# Altium PCB PCB1.PcbDoc
Units mm, origin at the board's own origin, x right, y up, seen from the top; angles counter-clockwise.
Board outline 91.81 x 66.02 mm, 2 copper layers (Top Layer, Bottom Layer), stack 0.325 mm thick; 31 components, 23 nets, 124 pads, 2 vias.
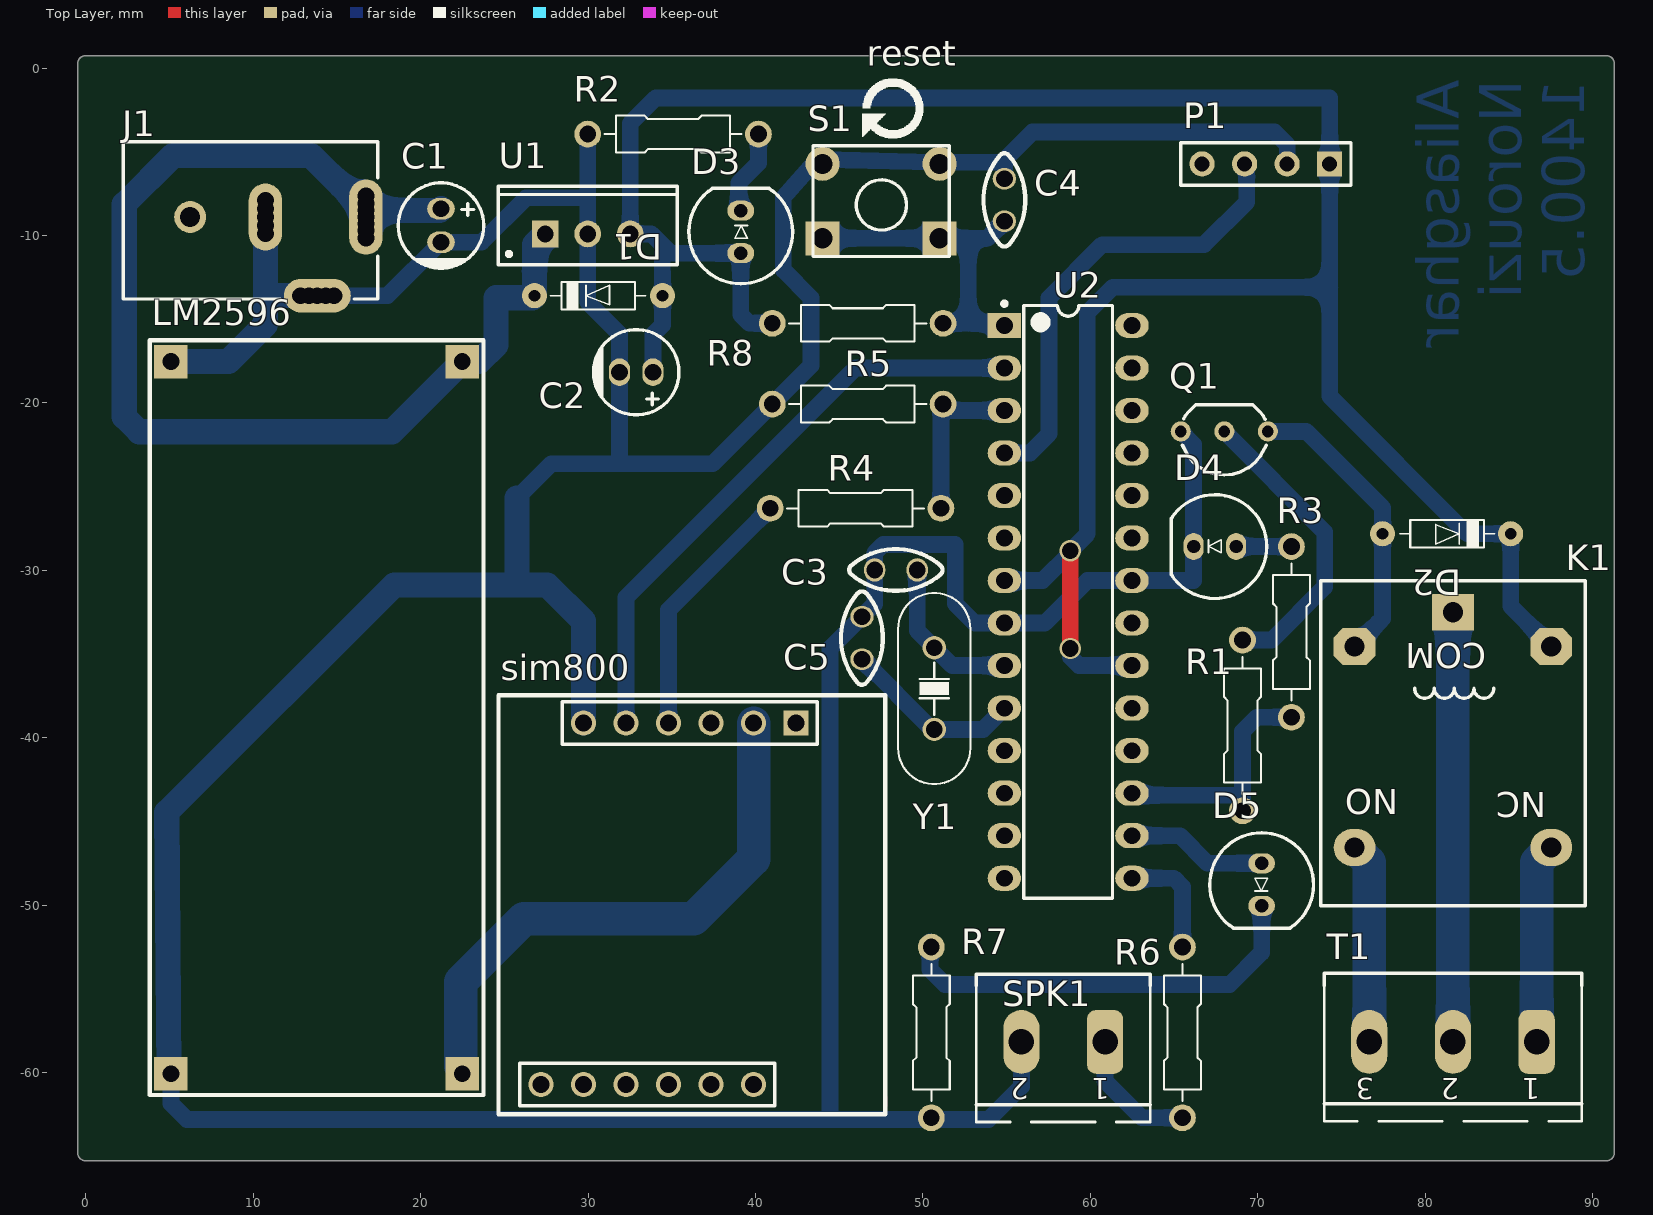
[diagram p0: Top Layer view]
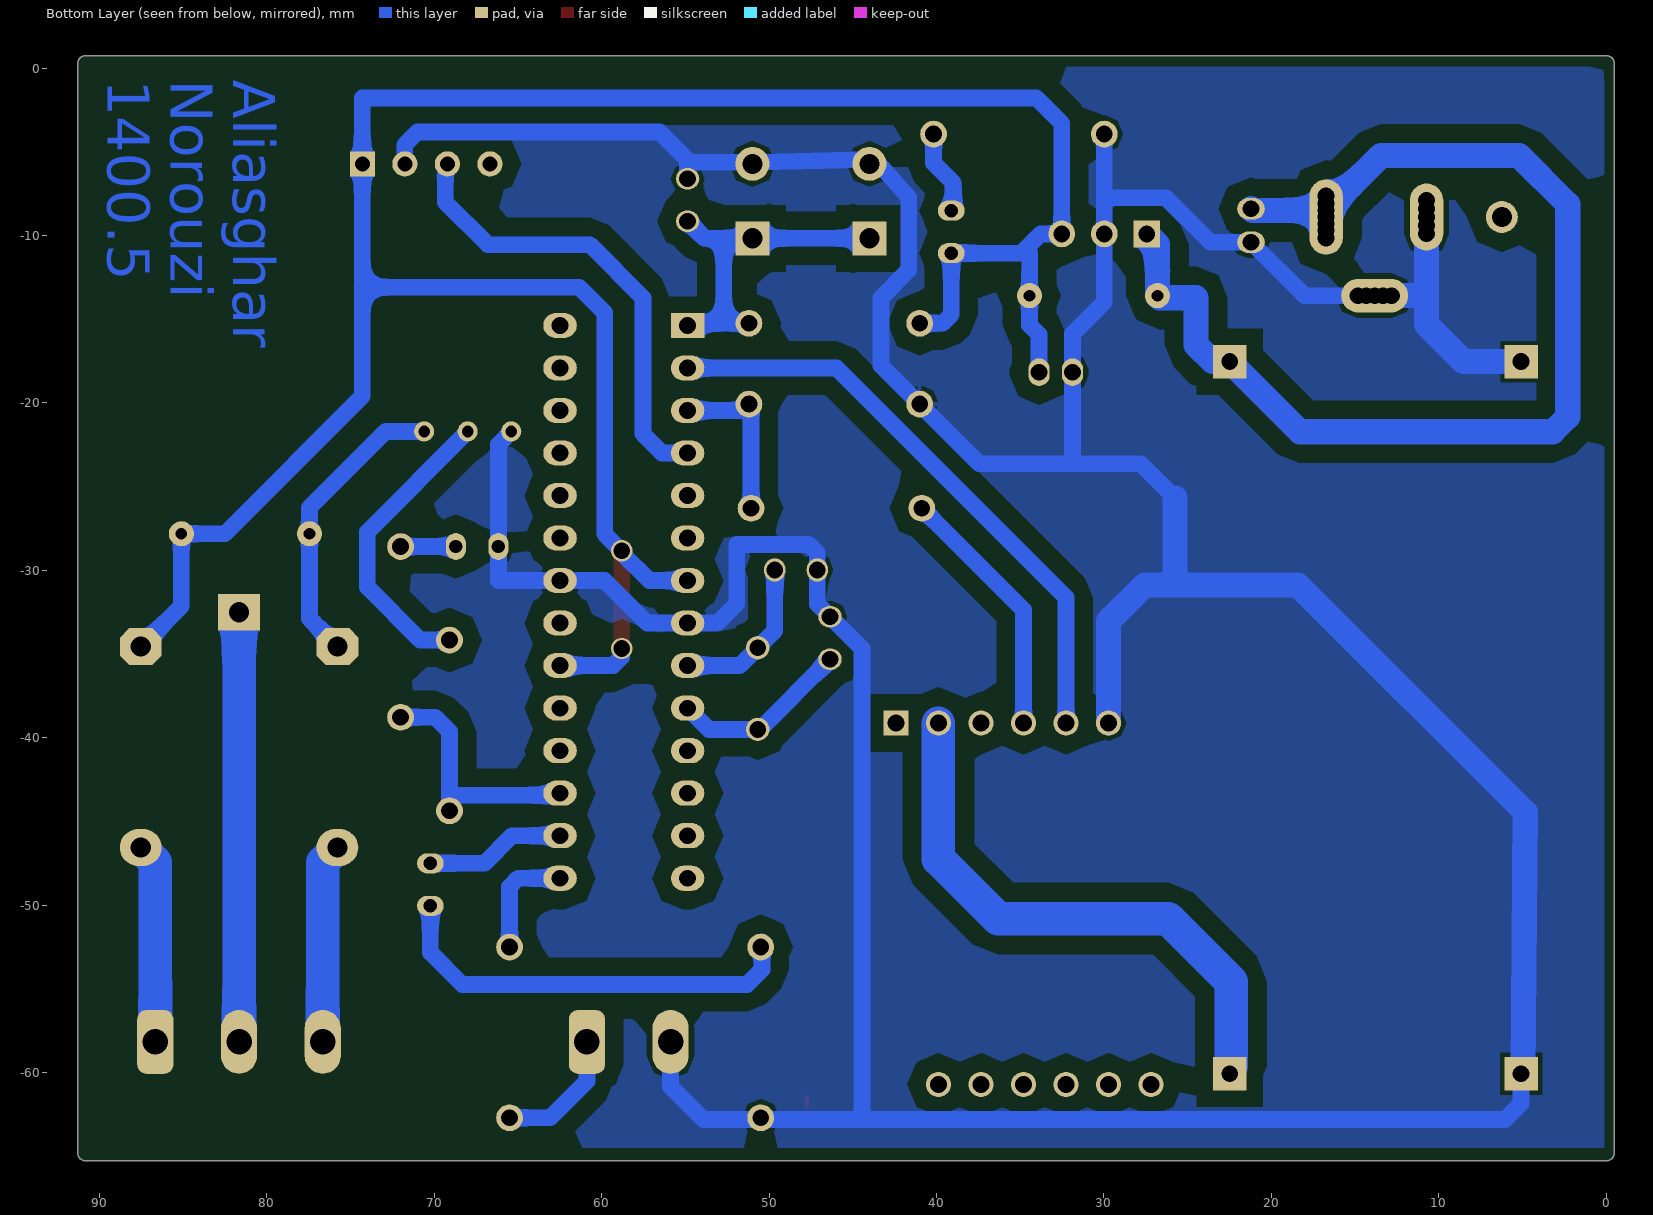
[diagram p1: Bottom Layer view, seen from below]
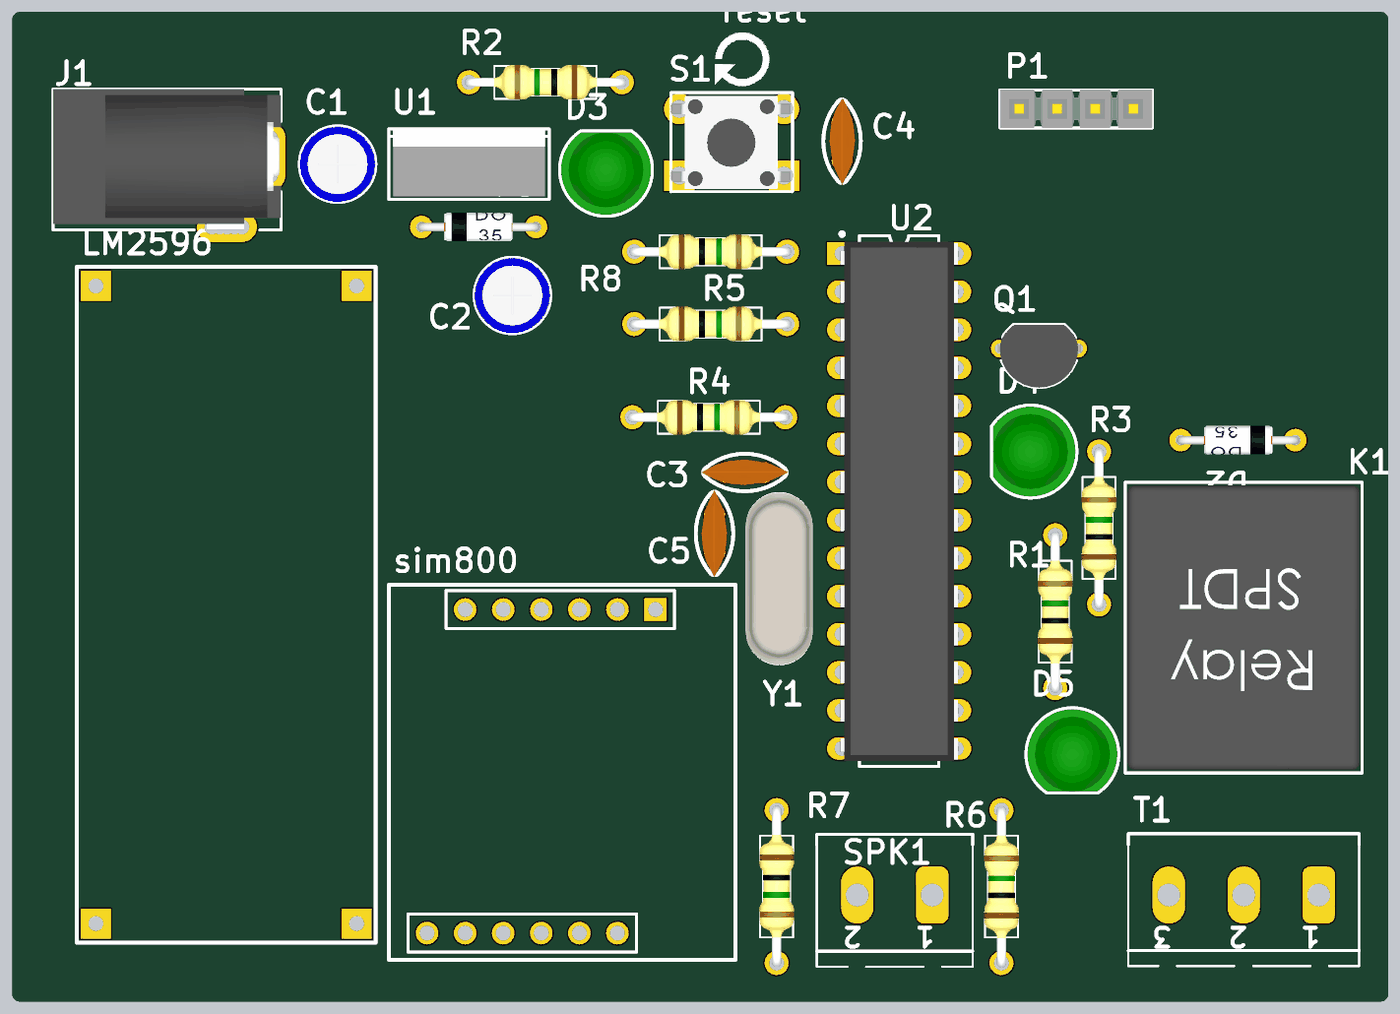
[diagram p2: 3D render of the assembled board from above, using the file's embedded part models]

## Layer stack, top to bottom
Top Solder: solder mask 0.0102, Solder Resist, Dk 3.5
Top Layer: signal copper 0.0356
Dielectric 1: dielectric 0.254, FR-4, Dk 4.2
Bottom Layer: signal copper 0.0356
Bottom Solder: solder mask 0.0102, Solder Resist, Dk 3.5

## Board outline
0,-65.27 cw(c0,-64.77) -0.5,-64.77 -0.5,0.254 cw(c0,0.254) 0,0.754 90.805,0.754 cw(c90.805,0.254) 91.305,0.254 91.305,-64.77 cw(c90.805,-64.77) 90.805,-65.27

## Design rules (kind name [scope] priority, off if disabled: settings)
Clearance [All] p1: gap=1 ignorepadtopadclearanceinfootprint=FALSE
Clearance "Poly Cls" [InPolygon] p2: gap=1.2 ignorepadtopadclearanceinfootprint=FALSE
PolygonConnect PolygonConnect_1 [InPolygon vs IsNamedPolygon('GND_L02_P006')] p1: connectstyle=Relief reliefconductorwidth=0.254 reliefentries=4 polygonreliefangle="90 Angle" airgapwidth=0.254
PolygonConnect [All] p2: connectstyle=Relief reliefconductorwidth=0.254 reliefentries=4 polygonreliefangle="90 Angle" airgapwidth=0.254
RoomDefinition Sheet1 [InComponentClass('Sheet1')] p1: confinementstyle=ConfineIn formatcopy=TRUE lockcomponents=FALSE outline -0.5,-65.3 91.3,-65.3 91.3,0.8 -0.5,0.8
RoutingVias [All] p1: holewidth=1 width=1.27 viastyle="Through Hole" minholewidth=1 minwidth=1.27 maxholewidth=1 maxwidth=1.27
SolderMaskExpansion [All] p1: expansion=0.102
Width [All] p1: maxlimit=2 minlimit=1 preferedwidth=1.5
30 further rules are at their usual default settings.

## Components (designator, comment, footprint, x,y, rotation, side; value= is the part's Value field where it differs from the comment)
C1 "20uF" "cap 01" 21.209,-9.398 r90 top
C2 "100uF" "cap 01" 32.872,-18.161 r0 top
C3 "22pF" "Cap - 100nF" 48.387,-29.972 r180 top
C4 "100n" "Cap - 100nF" 54.864,-7.874 r90 top
C5 "22pF" "Cap - 100nF" 46.355,-34.036 r270 top
D1 "1N4007" "DO 35" 30.622,-13.589 r0 top
D2 "1N4007" "DO 35" 81.28,-27.813 r180 top
D3 "LED5MM" LED5MM_YELLOW 39.116,-9.779 r90 top
D4 "LED5MM" LED5MM_YELLOW 67.437,-28.575 r180 top
D5 "LED5MM" LED5MM_BLUE 70.231,-48.768 r270 top
J1 "Power Jack" "Power Jack" 2.223,-8.89 r0 top
K1 "" "Relay 18.85x15.35x15.70" 81.657,-39.527 r180 top
LM2596 "LM2596" LM2696 23.749,-16.256 r270 top
P1 "Header 4" HDR1X4 74.295,-5.715 r180 top
Q1 "BC547" "TO-92 BENT" 68,-21.7 r180 top
R1 "1K" "Axial 0_25 W, 0_4 IN LEAD PITCH" 69.088,-39.263 r90 top
R2 "1K" "Axial 0_25 W, 0_4 IN LEAD PITCH" 35.072,-3.937 r180 top
R3 "1K" "Axial 0_25 W, 0_4 IN LEAD PITCH" 72.009,-33.675 r90 top
R4 "120" "Axial 0_25 W, 0_4 IN LEAD PITCH" 45.974,-26.289 r0 top
R5 "220" "Axial 0_25 W, 0_4 IN LEAD PITCH" 46.101,-20.066 r0 top
R6 "100" "Axial 0_25 W, 0_4 IN LEAD PITCH" 65.5,-57.6 r90 top
R7 "1K" "Axial 0_25 W, 0_4 IN LEAD PITCH" 50.5,-57.6 r270 top
R8 "10k" "Axial 0_25 W, 0_4 IN LEAD PITCH" 46.101,-15.24 r0 top
reset "Comment" "LOGO RESET" 48.3,-2.4 r0 top
S1 "Switch PB" "Switch - Push to On" 47.498,-7.937 r180 top
sim800 "sim800l" PCBComponent_1 24.384,-37.465 r270 top
SPK1 "1753437" "MSTBV 2,5/2-G-5" 58.38,-58.166 r180 top
T1 "1753453" "MSTBV 2,5/3-G-5" 81.661,-58.166 r180 top
U1 "L7805CV" "TO-220 AB" 29.972,-9.898 r0 top
U2 "ATmega8A-PU" 28P3 58.674,-31.877 r0 top
Y1 "12.0592 MHz" "CRYSTAL Small" 50.673,-37.057 r270 top

## Footprints (in the part's own frame and the unit in brackets; to place one, negate y for a bottom-side part, rotate by r counter-clockwise, add the part's x,y. Pads: shape width x height; smd on the part's side, far side on the other; paste and mask are expansions set on the pad)
28P3 [mm] "DIP, 28-Leads, Row Spacing 7.62mm, Pitch 2.54mm, Body 34.67x7.3mm"
  rect 2x1.5 hole 1: 1(-3.81,16.51)
  oval 2x1.5 hole 1: 2(-3.81,13.97) 3(-3.81,11.43) 4(-3.81,8.89) 5(-3.81,6.35) 6(-3.81,3.81) 7(-3.81,1.27) 8(-3.81,-1.27) 9(-3.81,-3.81) 10(-3.81,-6.35) 11(-3.81,-8.89) 12(-3.81,-11.43) 13(-3.81,-13.97) 14(-3.81,-16.51) 15(3.81,-16.51) 16(3.81,-13.97) 17(3.81,-11.43) 18(3.81,-8.89) 19(3.81,-6.35) 20(3.81,-3.81) 21(3.81,-1.27) 22(3.81,1.27) 23(3.81,3.81) 24(3.81,6.35) 25(3.81,8.89) 26(3.81,11.43) 27(3.81,13.97) 28(3.81,16.51)
  silkscreen extent -3.93,-17.7 2.65,17.93, body extent -3.95,-17.35 3.95,17.3, height 5.04
"Axial 0_25 W, 0_4 IN LEAD PITCH" [mm] "Designer Abbas Basereh"
  round 1.6 hole 1: 1(5.1,0) 2(-5.1,0)
  silkscreen extent -4.1,-1.1 4.1,1.1, body extent -5.4,-1.16 5.36,1.16, height 3.63
"cap 01" [mm]
  oval 1.27x1.651 hole 1: 1(1,0) 2(-1,0)
  silkscreen extent -2.55,-2.55 2.55,2.55, body extent -2.53,-2.53 2.53,2.53, height 12.54
"Cap - 100nF" [mm]
  oval 1.27x1.397 hole 1: 1(-1.27,0) 2(1.27,0)
  silkscreen extent -2.78,-1.25 2.79,1.25, body extent -2.92,-0.86 2.92,0.83, height 6.92
"CRYSTAL Small" [mm] "DESIGNER ABBAS BASEREH"
  round 1.397 hole 1: 1(-2.44,0) 2(2.44,0)
  silkscreen extent -5.71,-2.16 5.71,2.16, body extent -5.75,-2.25 5.75,2.25, height 3.61
"DO 35" [mm] "Diode"
  round 1.5 hole 0.7: 1(3.825,0) 2(-3.825,0)
  silkscreen extent -2.88,-0.85 2.8,0.85, body extent -4.1,-0.96 4.08,0.96, height 2.46
HDR1X4 [mm] "Connector; Header; 4 Position"
  rect 1.5x1.5 hole 0.9: 1(0,0)
  round 1.5 hole 0.9: 2(2.54,0) 3(5.08,0) 4(7.62,0)
  silkscreen extent -1.27,-1.27 8.89,1.27, body extent -1.27,-1.28 8.89,1.26, height 8.38
LED5MM_BLUE [mm] "LED 5MM THROUGH HOLE BLUE-Designer Abbas Basereh"
  oval 1.2x1.6 hole 0.8: 1(-1.27,0) 2(1.27,0)
  silkscreen extent -3.1,-3.1 2.6,3.1, body extent -3,-3 2.5,3, height 9.14
LED5MM_YELLOW [mm] "LED 5MM THROUGH HOLE YELLOW-Designer Abbas Basereh"
  oval 1.2x1.6 hole 0.8: 1(-1.27,0) 2(1.27,0)
  silkscreen extent -3.1,-3.1 2.6,3.1, body extent -3,-3 2.5,3, height 9.14
LM2696 [mm]
  rect 2x2 hole 1: +IN(1.27,-1.27) +OUT(43.815,-1.27) -IN(1.27,-18.669) -OUT(43.815,-18.669)
  silkscreen extent 0,-19.94 45.09,0
"LOGO RESET" [mm]
  silkscreen extent -1.93,-1.79 1.72,1.78
"MSTBV 2,5/2-G-5" [mil] "Header, Nominal current: 12 A Rated voltage (III/2): 320 V Number of positions: 2 Pitch: 5mm Color: green Contact surface: Tin Assembly: Soldering DESIGNER:ABBAS BASEREH"
  rrect50% 85x150 hole 60: 1(-98.43,0)
  oval 85x150 hole 60: 2(98.43,0)
  silkscreen extent -205,-159 205,188, body extent -197,-152 197,187, height 473
"MSTBV 2,5/3-G-5" [mil] "Header, Nominal current: 12 A Rated voltage (III/2): 320 V Number of positions: 3 Pitch: 5mm Color: green Contact surface: Tin Assembly: Soldering  DESIGNER:ABBAS BASEREH"
  rrect50% 85x150 hole 60: 1(-196.85,0)
  oval 85x150 hole 60: 2(0,0) 3(196.85,0)
  silkscreen extent -303,-161 303,186, body extent -295,-154 295,185, height 473
PCBComponent_1 [mm]
  rect 1.5x1.5 hole 1: 1(1.651,18.034)
  round 1.5 hole 1: 2(1.651,15.494) 3(1.651,12.954) 4(1.651,10.414) 5(1.651,7.874) 6(1.651,5.334) 7(23.241,15.494) 8(23.241,12.954) 9(23.241,10.414) 10(23.241,7.874) 11(23.241,5.334) 12(23.241,2.794)
  Top Layer lines w0.254: 24.511,23.368 24.003,23.368
  silkscreen extent 0,0.25 25.02,23.37
"Power Jack" [mm] "Power Adaptor Jack"
  round 1.5 hole 1: 1(14.5,-1.25) 1(14.5,-0.8) 1(14.5,-0.4) 1(14.5,0.4) 1(14.5,0.8) 1(14.5,1.25) 2(8.5,-1) 2(8.5,1) 2(8.5,-0.5) 2(8.5,0.5) 3(10.6,-4.7) 3(11.1,-4.7) 3(12.1,-4.7) 3(12.6,-4.7)
  oval 2x4.5 hole 1: 1(14.5,0)
  oval 2x4 hole 1: 2(8.5,0)
  oval 4x2 hole 1: 3(11.6,-4.7)
  round 1.9 hole 1.2: MH(4,0)
  silkscreen extent 0,-4.9 15.2,4.5, body extent 0,-4.9 15.2,4.5, height 11
"Relay 18.85x15.35x15.70" [mm] "DESIGNER ABBAS BASEREH"
  rect 2.5x2.2 hole 1.2: 1(0,-7.025)
  oval 2.5x2.2 hole 1.2: 2(-5.875,7.025) 3(5.875,7.025)
  oct 2.5x2.2 hole 1.2: 4(-5.875,-4.975) 5(5.875,-4.975)
  silkscreen extent -7.9,-8.9 7.9,10.5, body extent -7.75,-8.7 7.75,10.3, height 15.6
"Switch - Push to On" [mil]
  rect 80x80 hole 47.24: 1(-137.5,87.5) 1(137.5,87.5)
  round 80 hole 47.24: 2(-137.5,-87.5) 2(137.5,-87.5)
  silkscreen extent -160,-130 160,130, body extent -155,-121 157,123, height 205
"TO-92 BENT" [mm] "DESIGNER :ABBAS BASEREH"
  round 1.2 hole 0.7: 1(-2.6,0) 2(0,0) 3(2.6,0)
  silkscreen extent -2.51,-1.6 2.51,2.6, body extent -2.79,-1.59 2.79,2.61, height 10
"TO-220 AB" [mm] "Epoxy meets UL94, V0-Design:Abbas Basereh"
  rect 1.6x1.6 hole 1: 1(-2.54,0)
  round 1.6 hole 1: 2(0,0) 3(2.54,0)
  silkscreen extent -5.35,-1.85 5.35,2.85, body extent -5.08,-1.65 5.08,2.92, height 18.54

## Part data
C1 C2: library part Cap-Polar, "Polar Capacitor", Voltage=16V, Adding Date=1387/12/20, Designer="Saeid Jorablo", Organazation=ControTec
C3 C4 C5: library part Cap-Bipolar, "Bipolar Capacitor", Voltage=100V, Adding Date=1387/12/20, Designer="Saeid Jorablo", Organazation=ControTec
D1 D2: library part 1N4148, "DIODE GEN PURP 100V 200MA DO35", ComponentLink1Description="Manufacturer Link", ComponentLink1URL=http://www.digikey.com/product-detail/en/fairchild-on-semiconductor/1N4148/1N4148FS-ND/458603, ComponentLink2Description=Datasheet, PackageDescription="DIODE GEN PURP 100V 200MA DO35", PackageReference="DO 35", PackageVersion=2017-1-12, PART.NO=1N4148, Published=2017-1-12, Publisher="Abbas Basereh"
D3 D4 D5: "LED LIGHTING", Data=16-12-2016, Designer="Abbas Basereh"
K1: library part Relay_SPDT, "Single-Pole Dual-Throw Relay", ComponentLink1Description=Datasheet, Designer="Abbas Basereh", Mounting Technology=Through-Hole, Pin Count=0, Update Date=2017-3-1
P1: "Header, 4-Pin", LatestRevisionDate=17-Jul-2002, LatestRevisionNote="Re-released for DXP Platform.", Publisher="Altium Limited"
Q1: "NPN Transistor", Data=27-12-2016, Desc.="Plastic Medium-Power. Silicon NPN Transistors", Designer="Abbas Basereh"
R1 R2 R3 R4 R5 R6 R7 R8: library part "RES Axial 0.25W", "RES Axial 0.25W", Data=4-1-2017, Desc.="RES Axial 0.25W", Designer="Abbas Basereh"
S1: "Push Button Switch"
SPK1: library part CON_Phoenix_MSTBV_02, "2 Pitch: 5 mm Color: green Contact surface: Tin Assembly", Manufacturer="PHOENIX CONTACT", Max Current="12 A", Voltage="320 V", Category=Connector, ComponentLink1Description="Header, Nominal current: 12 A Rated voltage (III/2): 320 V Number of positions: 2 Pitch: 5 mm Color: green Contact surface: Tin Assembly: Soldering  DESIGNER:ABBAS BASEREH", ComponentLink2Description=Reference, Connector type="PCB Terminal Block", Designer="ABBAS BASEREH", Mounting Technology=Through-Hole, PART.NO=1753437, Pin Count=2, Positions=2, Revision 1=2017-3-1, Status=Unreleased
T1: library part CON_Phoenix_MSTBV_03, "3 Pitch: 5 mm Color: green Contact surface: Tin Assembly", Manufacturer="PHOENIX CONTACT", Max Current="12 A", Voltage="320 V", Category=Connector, ComponentLink1Description="Header, Nominal current: 12 A Rated voltage (III/2): 320 V Number of positions: 3 Pitch: 5 mm Color: green Contact surface: Tin Assembly: Soldering  DESIGNER:ABBAS BASEREH", ComponentLink2Description=Reference, Connector type="PCB Terminal Block", Designer="ABBAS BASEREH", Mounting Technology=Through-Hole, PART.NO=1753453, Pin Count=3, Positions=3, Revision 1=2017-3-1, Status=Unreleased
U1: library part "L7805CV-Linear Voltage Regulator IC Positive 1 Output 5V 1.5A TO-220AB", "Linear Voltage Regulator IC Positive FIXED", Manufacturer=STMicroelectronics, Designer="Abbas Basereh", Link=https://www.aliexpress.com/item/, Part. No=L7805CV
U2: "8-bit AVR Microcontroller, 8KB Flash, 512 Bytes EEPROM, 1KB SRAM, 28-pin PDIP, Industrial Grade (-40°C to 85°C)", Supplier Part Number 1=ATMEGA8A-PU-ND, ComponentLink1Description="Manufacturer Link", ComponentLink1URL=http://www.atmel.com/products/avr/default.asp?, ComponentLink2Description="ATmega8A Datasheet", ComponentLink2URL=http://www.atmel.com/dyn/resources/prod_documents/doc8159.pdf, ComponentLink3Description="ATmega8A Summary", ComponentLink3URL=http://www.atmel.com/dyn/resources/prod_documents/8159S.pdf, ComponentLink4Description="Atmel.com Home", ComponentLink4URL=http://www.atmel.com, DatasheetVersion=2017-1-5, PackageDescription="28-lead (0.300\"/7.62mm Wide) Plastic Dual Inline Package (PDIP)", PackageReference=28P3, PackageVersion=2017-1-5, Published=2017-1-5, Publisher="Abbas Basereh", Supplier 1=Digi-Key, Supplier 2=Farnell, Supplier 3=Mouser, Supplier Part Number 2=1748534, Supplier Part Number 3=556-ATMEGA8A-PU
Y1: library part XTAL_Crystal, "XTAL Crystal", ComponentLink1Description=Datasheet, ComponentLink2Description=Reference, Design Date=2017-1-3, Designer="ABBAS BASEREH", Mounting Technology="Surface Mount\Through-Hole", Status=Unreleased
J1: Adding Date=10/21/2009, Company=Personal, Designer="Saeid Jorablo", Project Name=Laser
sim800: name=SIM800L

## Via types
v1: diameter 1.27, hole 1, Top Layer to Bottom Layer, 2 vias

## Nets (pads, with @x,y where several pads share a name; then routed paths per layer and width w, separated by ;. In a path a pad name is that pad's centre, name@x,y a point inside that pad or via, vN(x,y) a via of type N, cw(c..) or ccw(c..) an arc to the next point about the centre after c; other vN are vias at no path point)
4.2V: LM2596.+OUT sim800.2 | length 34
  Bottom Layer w1: LM2596.+OUT@22.4,-59.611 LM2596.+OUT@22.606,-59.817
  Bottom Layer w2: LM2596.+OUT@22.4,-59.611 22.4,-54.562 26.162,-50.8 36.322,-50.8 39.878,-47.244 sim800.2
5V: C2.1 D1.1 D2.2 D3.1 K1.4 P1.1 R8.2 U1.3 U2.7 U2.20 | length 153.6
  Top Layer w1: v1(58.801,-34.671) v1(58.801,-28.829)
  Bottom Layer w1: C2.1 33.872,-15.912 34.447,-15.337 D1.1@34.447,-13.708 ; D1.1@34.443,-13.089 34.425,-11.049 34.925,-11.049 ; R8.2 39.624,-15.24 39.116,-14.732 D3.1 34.925,-11.049 ; U2.7 57.15,-30.607 58.801,-28.956 v1(58.801,-28.829) 59.817,-27.813 59.817,-14.605 61.341,-13.081 74.295,-13.081 ; v1(58.801,-34.671) 58.801,-35.179 59.309,-35.687 U2.20 ; K1.4 85.105,-32.125 D2.2 82.513,-27.813 74.295,-19.595 74.295,-13.081 ; 34.925,-11.049 33.774,-9.898 U1.3 32.512,-3.302 34.036,-1.778 74.295,-1.778 P1.1 74.295,-13.081
12V: C1.1 D1.2 J1.1 LM2596.+IN U1.1 | length 68.1
  Bottom Layer w1.5: C1.1 21.117,-8.49 16.723,-8.49 13.44,-5.207 5.207,-5.207 2.286,-8.128 2.286,-20.819 3.184,-21.717 18.288,-21.717 LM2596.+IN 23.495,-17.526 24.488,-16.533 24.488,-13.716 26.67,-13.716 D1.2 26.797,-10.533 U1.1
GND: C1.2 C2.2 C3.2 C4.2 C5.1 D4.2 J1.2 J1.3 LM2596.-IN LM2596.-OUT P1.2 Q1.3 R2.1 R5.2 R7.1 S1.2 sim800.6 SPK1.2 U1.2 U2.8 U2.22 | length 302.8
  Bottom Layer w1: LM2596.-OUT 5.08,-61.849 6.031,-62.8 53.913,-62.8 55.88,-60.833 SPK1.2 ; J1.3@14.823,-13.59 18.017,-13.59 C1.2 23.638,-10.398 26.289,-7.747 29.845,-7.747 ; 25.761,-25.674 27.813,-23.622 31.872,-23.622 ; R2.1 29.972,-7.62 29.845,-7.747 ; 44.45,-62.3 44.45,-34.671 C5.1 47.117,-32.004 C3.2 47.117,-28.956 47.625,-28.448 51.927,-28.448 51.927,-31.988 53.086,-33.147 U2.8 57.277,-33.147 59.817,-30.607 U2.22 66.167,-30.607 D4.2 66.167,-22.467 Q1.3 ; C4.2 54.864,-5.745 54.737,-5.618 ; P1.2@71.834,-5.715 P1.2 71.755,-4.572 70.993,-3.81 56.545,-3.81 54.737,-5.618 ; 29.845,-7.747 29.972,-7.874 U1.2 29.972,-13.97 31.872,-15.87 C2.2 31.872,-23.622 ; 31.872,-23.622 37.445,-23.622 R5.2 43.307,-17.76 43.307,-13.716 41.656,-12.065 41.656,-7.725 43.498,-5.629 43.88,-5.604 44.005,-5.461 44.011,-5.461 50.705,-5.618 50.927,-5.748 50.927,-5.693 S1.2@50.99,-5.715 ; S1.2@50.99,-5.715 50.927,-5.618 50.99,-5.618 S1.2@50.99,-5.715 ; S1.2@50.99,-5.715 51.024,-5.618 54.737,-5.618
  Bottom Layer w1.5: LM2596.-OUT@4.963,-60.072 4.827,-44.449 18.415,-30.861 25.761,-30.861 ; LM2596.-IN 8.509,-17.526 10.723,-15.312 10.723,-13.59 ; J1.2@10.723,-8.39 10.723,-9.39 10.723,-13.59 ; J1.3@12.823,-13.59 10.723,-13.59 ; 25.761,-25.674 25.761,-30.861 ; sim800.6 29.718,-33.02 27.559,-30.861 25.761,-30.861
INT: P1.3 U2.4 | length 27.7
  Bottom Layer w1: U2.4 56.388,-22.987 57.531,-21.844 57.531,-13.716 60.706,-10.541 66.802,-10.541 69.342,-8.001 P1.3@69.342,-5.715
LED: D5.1 U2.16 | length 8.4
  Bottom Layer w1: U2.16 65.347,-45.847 66.998,-47.498 D5.1
NetC3_1: C3.1 U2.9 Y1.1 | length 9.7
  Bottom Layer w1: C3.1 49.657,-33.601 Y1.1 51.743,-35.687 U2.9
NetC4_1: C4.1 R8.1 S1.1 U2.1 | length 20.3
  Bottom Layer w1: S1.1@44.005,-10.16 50.99,-10.16 52.705,-10.16 ; R8.1@51.195,-15.24 51.201,-15.367 R8.1 52.705,-15.24 ; U2.1 54.737,-15.24 52.705,-15.24 ; C4.1 53.848,-10.16 52.705,-10.16 ; 52.705,-15.24 52.705,-10.16
NetC5_2: C5.2 U2.10 Y1.2 | length 10.8
  Bottom Layer w1: C5.2 50.546,-39.497 Y1.2 53.594,-39.497 U2.10
NetD2_1: D2.1 K1.5 Q1.1 | length 17.7
  Bottom Layer w1: Q1.1 72.9,-21.7 77.455,-26.255 D2.1 77.455,-32.879 K1.5
NetD3_2: D3.2 R2.2 | length 4.8
  Bottom Layer w1: D3.2@38.989,-8.255 38.989,-6.858 40.172,-5.675 R2.2
NetD4_1: D4.1 R3.1 | length 3.3
  Bottom Layer w1: D4.1 R3.1
NetD5_2: D5.2 R7.2 | length 25.4
  Bottom Layer w1: R7.2@50.419,-52.197 50.419,-53.848 51.308,-54.737 68.326,-54.737 70.231,-52.832 D5.2
NetK1_1: K1.1 T1.2 | length 25.7
  Bottom Layer w2: K1.1 81.657,-58.162 T1.2
NetK1_2: K1.2 T1.1 | length 12
  Bottom Layer w2: T1.1 86.661,-47.423 K1.2
NetK1_3: K1.3 T1.3 | length 12
  Bottom Layer w2: K1.3 76.661,-47.431 T1.3
NetQ1_2: Q1.2 R1.1 | length 18
  Bottom Layer w1: Q1.2 74,-27.7 74,-31 70.837,-34.163 R1.1
NetR4_2: R4.2 sim800.4 | length 15.3
  Bottom Layer w1: sim800.4 34.798,-32.365 R4.2
NetR6_2: R6.2 SPK1.1 | length 8.2
  Bottom Layer w1: SPK1.1 60.88,-60.499 63.081,-62.7 R6.2 R6.2@65.786,-62.7
RELAY: R1.2 R3.2 U2.17 | length 14.7
  Bottom Layer w1: U2.17 62.611,-43.434 69.088,-43.434 ; R1.2 69.088,-43.434 ; R3.2 69.937,-38.775 69.088,-39.624 69.088,-43.434
RX: R4.1 R5.1 U2.3 | length 10.3
  Bottom Layer w1: R4.1 51.074,-20.193 R5.1 51.582,-20.447 U2.3 U2.3@54.737,-20.574
SPK: R6.1 U2.15 | length 6.8
  Bottom Layer w1: U2.15 64.987,-48.387 65.5,-48.9 R6.1
TX: sim800.5 U2.2 | length 35.8
  Bottom Layer w1: sim800.5 32.258,-31.623 45.974,-17.907 U2.2
pads on no net: J1.MH P1.4 sim800.1 sim800.3 sim800.7 sim800.8 sim800.9 sim800.10 sim800.11 sim800.12 U2.5 U2.6 U2.11 U2.12 U2.13 U2.14 U2.18 U2.19 U2.21 U2.23 U2.24 U2.25 U2.26 U2.27 U2.28

## Polygon pours and split planes (outlines as drawn)
GND on Bottom Layer "poly1" (solid, remove dead copper, pour order 8): 0.1,0.2 0.2,0.1 90.8,0.1 90.8,-29.9 90.7,-29.8 71.5,-29.8 71.5,-64.7 71.3,-64.5 0.1,-64.5 0.1,-0.1 -0.1,0.1

## Other copper
Bottom Layer:
  text "Aliasghar / Norouzi / 1400.5" at 89.5,-0.7 h2.5 r90

## Silkscreen, mask and mechanical layers (free items; w line width, h text height)
Mechanical 13:
  lines w1: 0,-64.77 0,0.254 90.805,0.254 90.805,-64.77 0,-64.77

## Text inside footprints (layer, text, board x,y; h text height)
K1: Top Overlay "COM" at 83.638,-34.345 h1.5 r180; Top Overlay "NO" at 78.406,-43.083 h1.5 r180; Top Overlay "NC" at 87.245,-43.261 h1.5 r180
SPK1: Top Overlay "1" at 61.152,-60.331 h1.27 r180; Top Overlay "2" at 56.326,-60.331 h1.27 r180
T1: Top Overlay "3" at 76.967,-60.331 h1.27 r180; Top Overlay "2" at 82.047,-60.331 h1.27 r180; Top Overlay "1" at 86.873,-60.331 h1.27 r180